# Altium PCB Main Display Module.PcbDoc
Units mil, origin at the board's own origin, x right, y up, seen from the top; angles counter-clockwise.
Board outline 3865 x 3535 mil, 2 copper layers (Top Layer, Bottom Layer); 76 components, 69 nets, 252 pads, 68 vias.
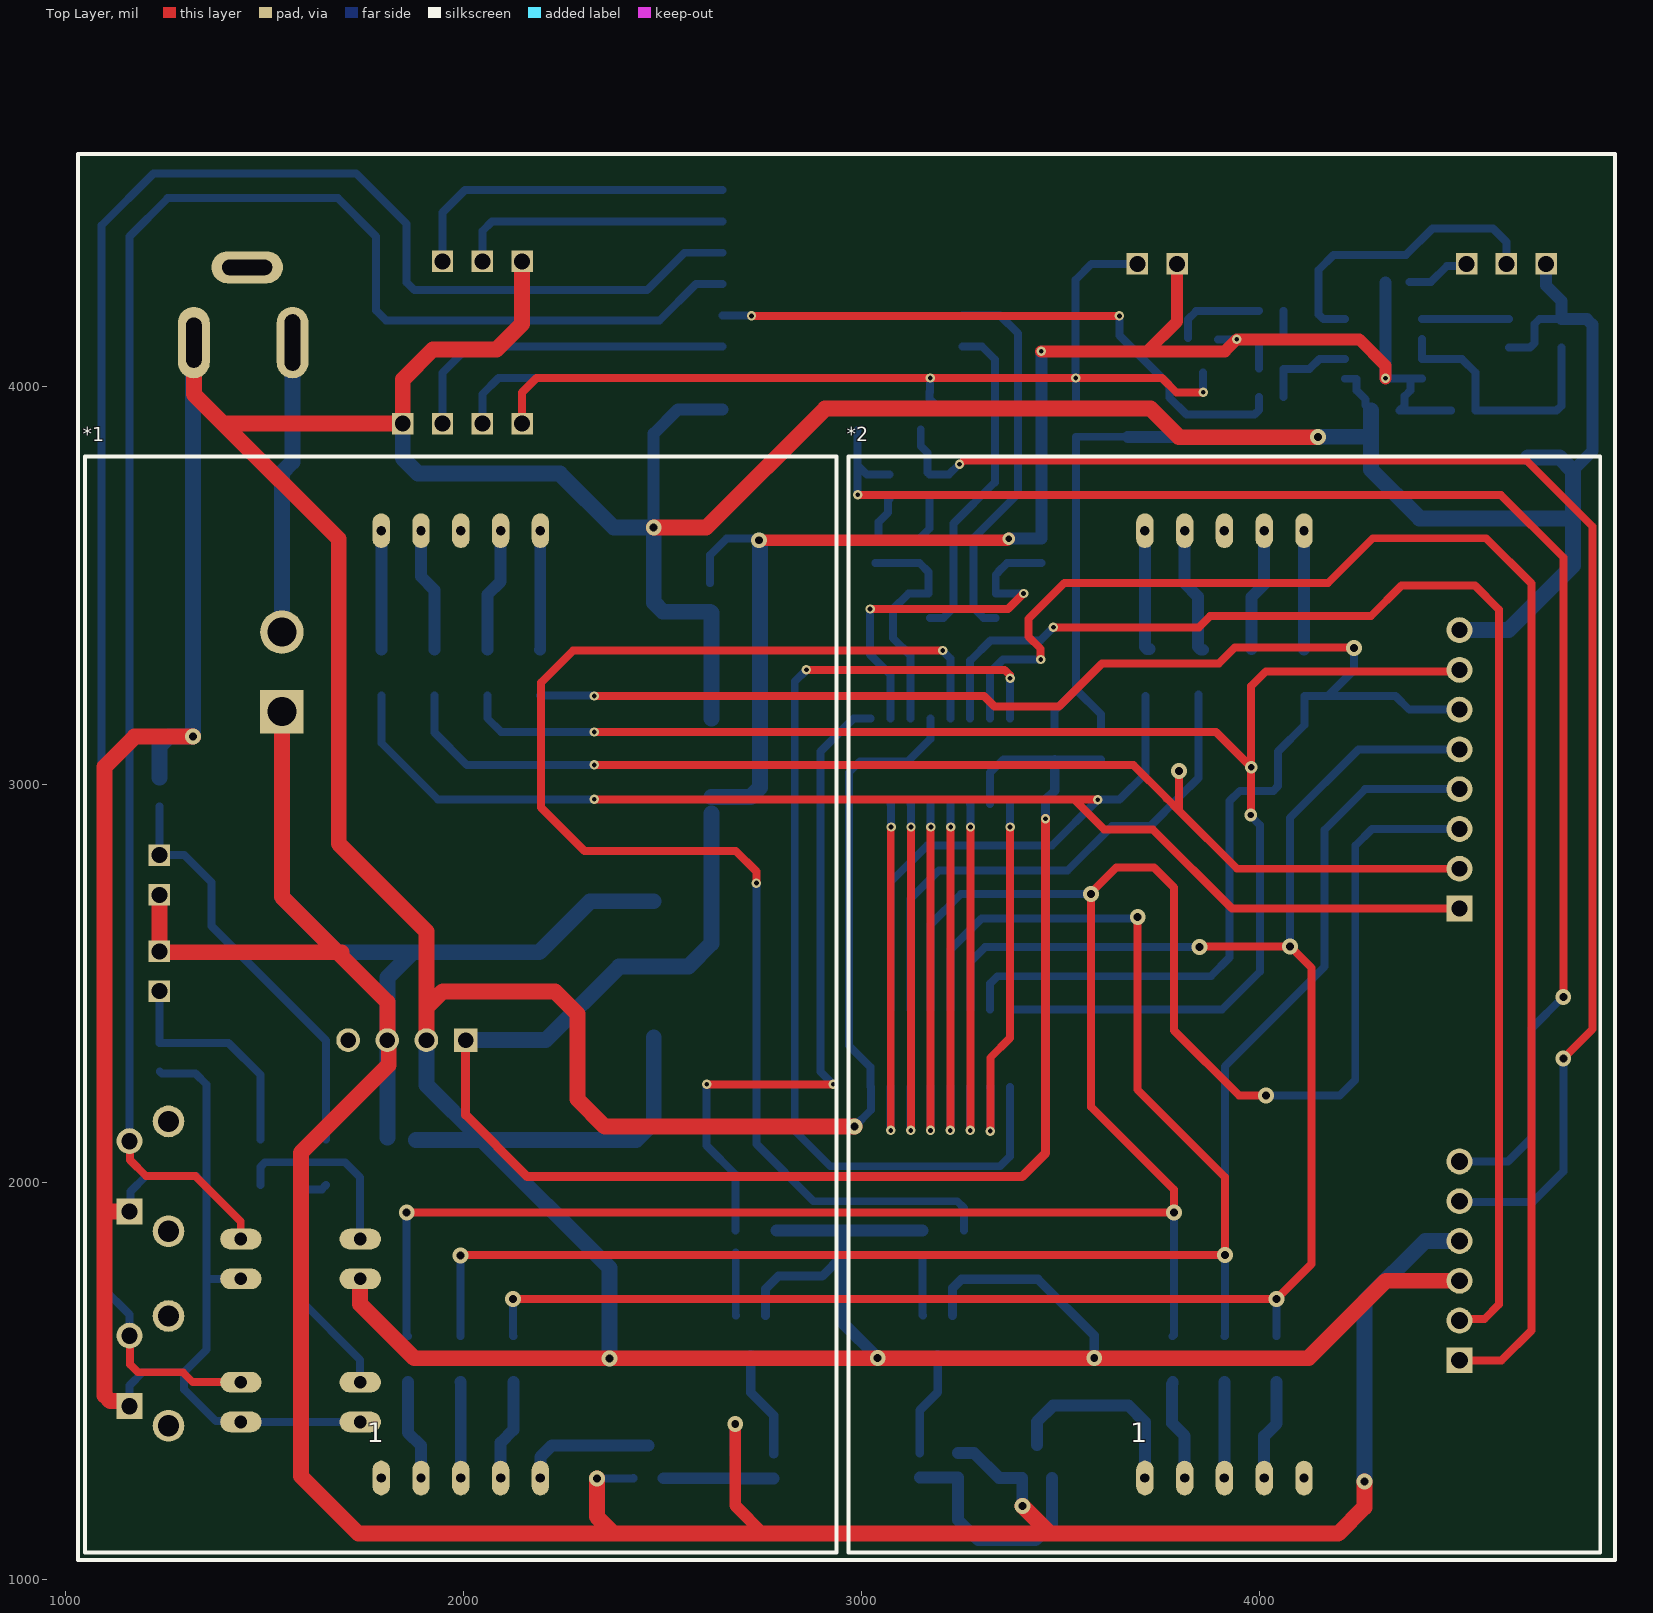
[diagram p0: Top Layer view]
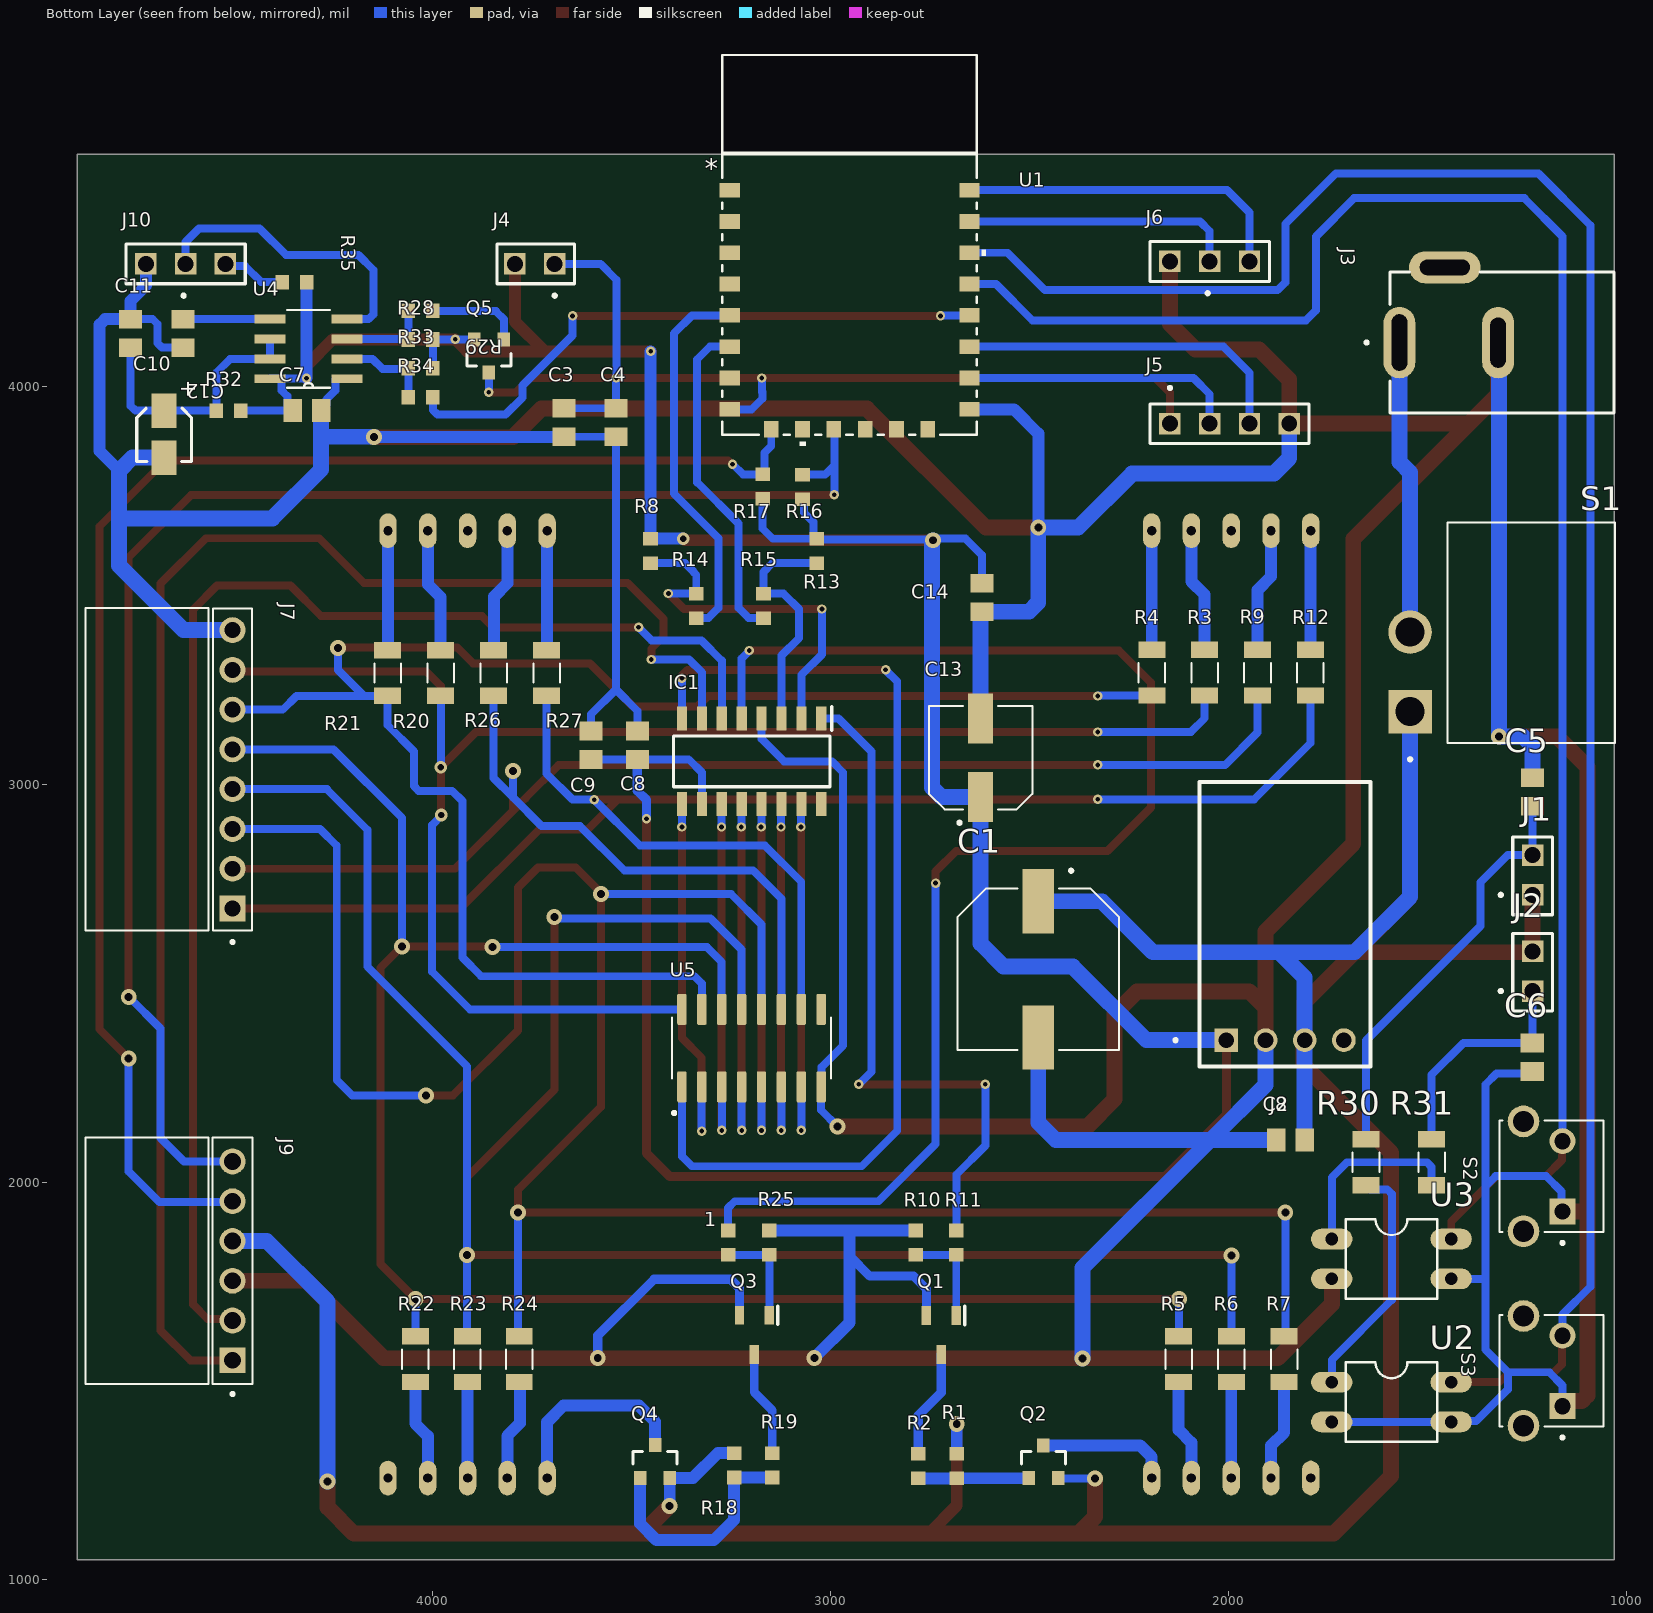
[diagram p1: Bottom Layer view, seen from below]
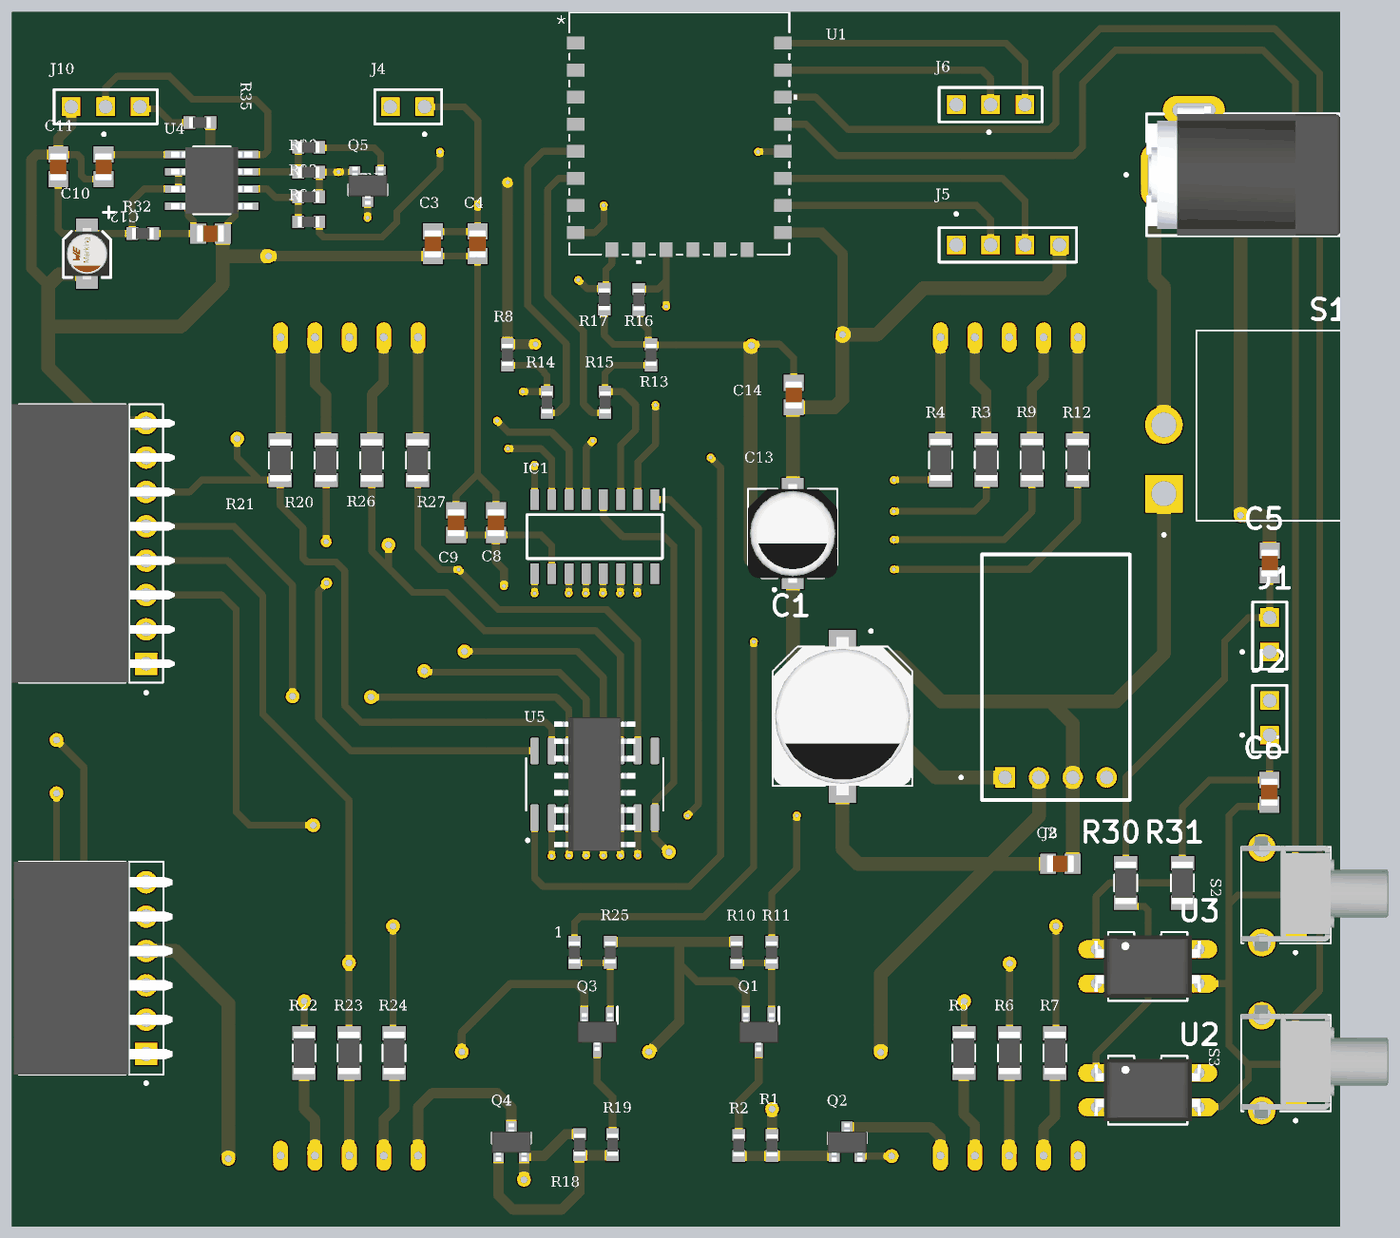
[diagram p2: 3D render of the assembled board from below, using the file's embedded part models]

## Layer stack, top to bottom
Top Solder: solder mask 0.4, Solder Resist, Dk 3.5
Top Layer: signal copper 1.4
Dielectric 1: dielectric 12.6, FR-4, Dk 4.8
Bottom Layer: signal copper 1.4
Bottom Solder: solder mask 0.4, Solder Resist, Dk 3.5

## Board outline
1030,1050 1030,4585 4895,4585 4895,1050

## Design rules (kind name [scope] priority, off if disabled: settings)
Clearance [All] p1: gap=10 ignorepadtopadclearanceinfootprint=FALSE except(0: Arc-Hole Track-Hole SMDPad-Hole THPad-Hole Via-Hole Fill-Hole Poly-Hole Region-Hole Text-Hole)
PolygonConnect [All] p1: connectstyle=Relief reliefconductorwidth=10 reliefentries=4 polygonreliefangle="90 Angle" airgapwidth=10
RoomDefinition "Main Display Module" [InComponentClass('Main Display Module')] p1: confinementstyle=ConfineIn formatcopy=TRUE lockcomponents=FALSE outline 878,1035 4895,1035 4895,4844 878,4844
RoutingVias [All] p1: holewidth=11.81 width=23.62 viastyle="Through Hole" minholewidth=11.81 minwidth=23.62 maxholewidth=28 maxwidth=50
SolderMaskExpansion [All] p1: expansion=4 istentingtop=FALSE
Width [All] p1: maxlimit=100 minlimit=20 preferedwidth=40 minimp=50.000000 maximp=50.000000 favimp=50.000000
30 further rules are at their usual default settings.

## Components (designator, comment, footprint, x,y, rotation, side; value= is the part's Value field where it differs from the comment)
1 "22R" RES0603 3258,1847.83 r90 bottom
*1 "7 Seg" 2.3_7-SEG_DIS 1993,2449 r0 top
*2 "7 Seg" 2.3_7-SEG_DIS 3913,2449 r0 top
C1 "220uF 35V" "220uF 35V" 2478,2535 r270 bottom
C2 "100nF" "Capacitor 0805" 1844,2106 r0 bottom
C3 "100nF" "Capacitor 0805" 3670,3910 r90 bottom
C4 "1uF" "Capacitor 0805" 3540,3910 r90 bottom
C5 "100nF" "Capacitor 0805" 1235,2981 r270 bottom
C6 "100nF" "Capacitor 0805" 1236,2314 r270 bottom
C7 "100nF" "Capacitor 0805" 4317,3940 r0 bottom
C8 "100nF" "Capacitor 0805" 3486.22,3098.43 r90 bottom
C9 "1uF" "Capacitor 0805" 3602.36,3098.43 r90 bottom
C10 "10uF_16V" 10uF_16V 4676,3881 r90 bottom
C11 "100nF" "Capacitor 0805" 4760,4134 r270 bottom
C12 "100nF" "Capacitor 0805" 4628,4134.17 r90 bottom
C13 "47uF 16v" "47uf 16v" 2623,3067 r90 bottom
C14 "100nF" "Capacitor 0805" 2620,3470 r270 bottom
IC1 "TM1650" "TM1650 SOIC127P604X185-16N" 3198.77,3058 r270 bottom
J1 "Pin Header Male 2 Pin_1" "2Pin-M-Header_3MX1-254MM - duplicate" 1235.06,2722.35 r180 bottom
J2 "Pin Header Male 2 Pin_1" "2Pin-M-Header_3MX1-254MM - duplicate" 1235.06,2480.47 r180 bottom
J3 "DC_Power_Jack" DC_Power_Jack 1312,4111 r90 bottom
J4 "Pin Header Male 2 Pin_1" "2Pin-M-Header_3MX1-254MM - duplicate" 3694,4309 r90 bottom
J5 "Programming Port" 4Pin-M-Header_3MX1-254MM 2147,3907 r270 bottom
J6 "Pin Header Male 3 Pin" "3Pin-M-Header_3MX1-254MM - duplicate" 1947,4315 r90 bottom
J7 "Pin Header Female 8 Pin" 8Pin-F-Header_8FX1-254MM 4504,3038 r90 bottom
J8 "Buck Conv" "Regulator Buck-Conv" 1857.36,2896.33 r0 bottom
J9 "Pin Header Female 6 Pin" 6Pin-F-Header_6FX1-254MM 4504,1802 r90 bottom
J10 "Pin Header Male 3 Pin" "3Pin-M-Header_3MX1-254MM - duplicate" 4522,4309 r90 bottom
Q1 "AO3400-N" AO-3400-N-SOT95 2721.87,1615.5 r270 bottom
Q2 "AO3401-P" AO-3401-P-SOT23-3 2465,1295 r180 bottom
Q3 "AO3400-N" AO-3400-N-SOT95 3192,1616 r270 bottom
Q4 "AO3401-P" AO-3401-P-SOT23-3 3441.6,1295.37 r180 bottom
Q5 "AO3401-P" AO-3401-P-SOT23-3 3859.31,4079.31 r0 bottom
R1 "100k" RES0603 2683.19,1286 r270 bottom
R2 "100R" RES0603 2779.8,1286 r90 bottom
R3 "150R" "Resistor 1206" 2059.71,3281.1 r90 bottom
R4 "150R" "Resistor 1206" 2192.6,3281.1 r90 bottom
R5 "150R" "Resistor 1206" 2125,1555 r270 bottom
R6 "150R" "Resistor 1206" 1992.5,1555 r270 bottom
R7 "150R" "Resistor 1206" 1860,1555 r270 bottom
R8 "4.7k" RES0603 3453,3587 r270 bottom
R9 "150R" "Resistor 1206" 1926.82,3281.1 r90 bottom
R10 "100k" RES0603 2786.43,1847.83 r270 bottom
R11 "4.7k" RES0603 2684.19,1847.83 r90 bottom
R12 "150R" "Resistor 1206" 1793.94,3281.1 r90 bottom
R13 "4.7k" RES0603 3035,3587 r270 bottom
R14 "22R" RES0603 3338,3449 r270 bottom
R15 "22R" RES0603 3169,3449 r270 bottom
R16 "10k" RES0603 3070.87,3748.03 r90 bottom
R17 "10k" RES0603 3171,3749 r90 bottom
R18 "100k" RES0603 3243,1288 r270 bottom
R19 "100R" RES0603 3147,1288 r90 bottom
R20 "150R" "Resistor 1206" 3980.76,3280.07 r90 bottom
R21 "150R" "Resistor 1206" 4114,3280.07 r90 bottom
R22 "150R" "Resistor 1206" 4044.43,1555 r270 bottom
R23 "150R" "Resistor 1206" 3913.72,1555 r270 bottom
R24 "150R" "Resistor 1206" 3783,1555 r270 bottom
R25 "100k" RES0603 3154,1847.83 r270 bottom
R26 "150R" "Resistor 1206" 3847.52,3280.07 r90 bottom
R27 "150R" "Resistor 1206" 3714.28,3280.07 r90 bottom
R28 "100k" RES0603 4031,4118.67 r180 bottom
R29 "100R" RES0603 4031,4191 r0 bottom
R30 "1k" "Resistor 1206" 1654,2050 r270 bottom
R31 "1k" "Resistor 1206" 1489,2050 r270 bottom
R32 "470k" RES0603 4514,3940 r180 bottom
R33 "10k" RES0603 4031,4046.33 r180 bottom
R34 "100R" RES0603 4031,3974 r0 bottom
R35 "10k" RES0603 4348,4263 r0 bottom
S1 "DC_SW" DC_SW 1543,3513 r270 bottom
S2 "Switch FSMRA6JH" SWITCH_FSMRA6JH 1160,2014.58 r90 bottom
S3 "Switch FSMRA6JH" SWITCH_FSMRA6JH 1160,1525.42 r90 bottom
U1 "PB-03F" PB-03F 2952.63,4356.5 r180 bottom
U2 "PC817X3NSZ9F" "PC 817" 1590,1447 r270 bottom
U3 "PC817X3NSZ9F" "PC 817" 1590,1807 r270 bottom
U4 "ICM7555IBAZ" ICM7555 4313,4095 r0 bottom
U5 "ULN2003AD" "ULN 2003 SOIC127P600X175-16N" 3199,2337 r90 bottom

## Footprints (in the part's own frame and the unit in brackets; to place one, negate y for a bottom-side part, rotate by r counter-clockwise, add the part's x,y. Pads: shape width x height; smd on the part's side, far side on the other; paste and mask are expansions set on the pad)
2.3_7-SEG_DIS [mm]
  oval 1.108x2.216 hole 0.6: 1(-5.08,-30.3) 2(-2.54,-30.302) 3(0,-30.302) 4(2.54,-30.302) 5(5.08,-30.302) 6(5.08,30.201) 7(2.54,30.201) 8(0,30.201) 9(-2.54,30.201) 10(-5.08,30.201)
  silkscreen extent -24,-35.05 24,34.95
"2Pin-M-Header_3MX1-254MM - duplicate" [mm]
  rect 1.37x1.37 hole 1.02: 01(0,0) 02(0,2.54)
  silkscreen extent -2.13,-1.27 1.27,3.68
"3Pin-M-Header_3MX1-254MM - duplicate" [mm]
  rect 1.37x1.37 hole 1.02: 01(0,0) 02(0,2.54) 03(0,5.08)
  silkscreen extent -2.13,-1.27 1.27,6.35
4Pin-M-Header_3MX1-254MM [mm]
  rect 1.37x1.37 hole 1.02: 1(0,0) 2(0,2.54) 3(0,5.08) 4(0,7.62)
  silkscreen extent -2.39,-1.27 1.27,8.89
6Pin-F-Header_6FX1-254MM [mil]
  rect 65x65 hole 42.13: 1(-250,0)
  round 65 hole 42.13: 2(-150,0) 3(-50,0) 4(50,0) 5(150,0) 6(250,0)
  silkscreen extent -339,-50 310,370, body extent -310,-76 310,385, height 101
8Pin-F-Header_8FX1-254MM [mil]
  rect 65x65 hole 40.16: 1(-350,0)
  round 65 hole 40.16: 2(-250,0) 3(-150,0) 4(-50,0) 5(50,0) 6(150,0) 7(250,0) 8(350,0)
  silkscreen extent -438,-49 405,370, body extent -405,-84 405,391, height 99
10uF_16V [mm]
  rect 2.2x1.6 smd: 1(1.5,0) 2(-1.5,0)
  silkscreen extent -1.75,-1.75 1.65,1.75, body extent -1.9,-1.65 1.9,1.65, height 5.35
"47uf 16v" [mm]
  rect 3.2x1.6 smd: 1(-2.5,0) 2(2.5,0)
  silkscreen extent -4.25,-3.3 3.3,3.3, body extent -3.65,-3.3 3.65,3.3, height 5.8
"220uF 35V" [mm]
  rect 4.1x2 smd: 1(-4.35,0) 2(4.35,0)
  silkscreen extent -6.4,-5.15 5.15,5.15, body extent -5.85,-5.15 5.85,5.15, height 10.32
AO-3400-N-SOT95 [mm]
  rect 1.2x0.6 smd: 1(-1.25,0.95) 2(-1.25,-0.95) 3(1.25,0)
  silkscreen extent -1.85,1.5 -0.65,1.5, body extent -1.4,-1.45 1.4,1.45, height 1.25
AO-3401-P-SOT23-3 [mm]
  rect 0.8x0.9 smd: 1(-0.95,-1) 2(0.95,-1) 3(0,1.1)
  silkscreen extent -1.4,-0.1 1.4,0.7, body extent -1.45,-1.4 1.45,1.4, height 1.25
"Capacitor 0805" [mm]
  rect 1.19x1.47 smd: 1(-0.91,0) 2(0.91,0)
  body extent -1,-0.63 1,0.63, height 1.45
DC_Power_Jack [mm]
  oval 4.572x2.032 hole 1 slot 3.6 at 0 deg: 1(0,6.55)
  oval 4.572x2.032 hole 1 slot 3.2 at 0 deg: 2(0,0.25)
  oval 2.032x4.572 hole 1 slot 3.2 at 90 deg: 3(4.8,3.65)
  silkscreen extent -4.5,-7.15 4.5,8.75, body extent -4.5,-7.15 5.05,7.15, height 11
DC_SW [mm]
  rect 2.775x2.775 / inner round 2.775 / far side rect 2.775x2.775 hole 1.85: 1(8.382,0)
  round 2.775 hole 1.85: 1A(3.302,0)
  silkscreen extent -3.68,-0.1 11.53,13.08
ICM7555 [mil]
  rect 78x22 smd: 1(-97,75) 2(-97,25) 3(-97,-25) 4(-97,-75) 5(97,-75) 6(97,-25) 7(97,25) 8(97,75)
  silkscreen extent -54,-98 54,98, body extent -118,-96 118,96, height 69
PB-03F [mil]
  rect 51x37 smd paste+0 mask+0: 1(-301.5,137.8) 2(-301.5,59.06) 3(-301.5,-19.69) 4(-301.5,-98.43) 5(-301.5,-177.17) 6(-301.5,-255.91) 7(-301.5,-334.65) 8(-301.5,-413.39) 15(301.5,-413.39) 16(301.5,-334.65) 17(301.5,-255.91) 18(301.5,-177.17) 19(301.5,-98.43) 20(301.5,-19.69) 21(301.5,59.06) 22(301.5,137.8)
  rect 37x42 smd paste+0 mask+0: 9(-196.85,-463.5) 10(-118.11,-463.5) 11(-39.37,-463.5) 12(39.37,-463.5) 13(118.11,-463.5) 14(196.85,-463.5)
  silkscreen extent -320,-504 342,478
"PC 817" [mil]
  oval 52x104 hole 32: 1(-50,-150) 2(50,-150) 3(50,150) 4(-50,150)
  silkscreen extent -100,-115 100,115, body extent -91,-155 91,155, height 319
"Regulator Buck-Conv" [mm]
  rect 1.508x1.508 / inner round 1.508 / far side rect 1.508x1.508 hole 1: 1(3.75,13.699)
  round 1.508 hole 1: 2(1.25,13.699) 3(-1.25,13.699) 4(-3.75,13.699)
  silkscreen extent -5.46,-2.79 7.1,15.37, body extent -5.46,-2.86 5.46,15.3, height 0.25
RES0603 [mm]
  rect 0.87x0.93 smd: 1(-0.78,0) 2(0.78,0)
  body extent -0.8,-0.4 0.8,0.4, height 0.55
"Resistor 1206" [mm]
  rect 1.05x1.72 smd: 1(-1.46,0) 2(1.46,0)
  silkscreen extent -0.62,-0.85 0.62,0.85, body extent -1.55,-0.77 1.55,0.77, height 0.65
SWITCH_FSMRA6JH [mm]
  rect 1.651x1.651 hole 1.041: 1(-2.25,0)
  round 1.651 hole 1.041: 2(2.25,0)
  round 2.026 hole 1.351: S1(-3.505,2.49) S2(3.505,2.49)
  silkscreen extent -4.35,-2.61 3.55,4.01, body extent -4.09,-6.83 4.32,4.03, height 10.62
"TM1650 SOIC127P604X185-16N" [mm]
  rect 1.53x0.65 smd: 1(-2.735,4.445) 2(-2.735,3.175) 3(-2.735,1.905) 4(-2.735,0.635) 5(-2.735,-0.635) 6(-2.735,-1.905) 7(-2.735,-3.175) 8(-2.735,-4.445) 9(2.735,-4.445) 10(2.735,-3.175) 11(2.735,-1.905) 12(2.735,-0.635) 13(2.735,0.635) 14(2.735,1.905) 15(2.735,3.175) 16(2.735,4.445)
  silkscreen extent -3.5,-5 1.62,5.12
"ULN 2003 SOIC127P600X175-16N" [mm]
  rrect25% 1.97x0.6 smd: 1(-2.475,4.445) 2(-2.475,3.175) 3(-2.475,1.905) 4(-2.475,0.635) 5(-2.475,-0.635) 6(-2.475,-1.905) 7(-2.475,-3.175) 8(-2.475,-4.445) 9(2.475,-4.445) 10(2.475,-3.175) 11(2.475,-1.905) 12(2.475,-0.635) 13(2.475,0.635) 14(2.475,1.905) 15(2.475,3.175) 16(2.475,4.445)
  silkscreen extent -4.24,-5.06 1.95,5.06, body extent -3,-4.95 3,4.95, height 1.75

## Part data
1 R1 R2 R8 R10 R11 R13 R14 R15 R16 R17 R18 R19 R25 R28 R29 R32 R33 R34 R35: library part "Resistor 0603", "Fixed Resistor CRGCQ 1206 10K 5%", Package="3115 TE Connectivity", Check_prices=https://www.snapeda.com/parts/CRGCQ1206J10K/TE+Connectivity/view-part/?ref=eda, MF="TE Connectivity", MP=CRGCQ1206J10K, SnapEDA_Link=https://www.snapeda.com/parts/CRGCQ1206J10K/TE+Connectivity/view-part/?ref=snap
C1: "220ÂµF 35V Aluminum Electrolytic Capacitors Radial, Can - SMD 2000 Hrs @ 85Â°C", Package="RADIAL-2 Panasonic", Availability="In Stock", Check_prices=https://www.snapeda.com/parts/EEE1VA221P/Panasonic/view-part/?ref=eda, MF=Panasonic, MP=EEE1VA221P, Price=None, SnapEDA_Link=https://www.snapeda.com/parts/EEE1VA221P/Panasonic/view-part/?ref=snap
C2 C3 C4 C5 C6 C7 C8 C9 C11 C12 C14: library part "Capacitor 0805", "0.1 ÂµF Â±10% 50V Ceramic Capacitor X7R 0805 (2012 Metric)", Package="2012 Murata", Check_prices=https://www.snapeda.com/parts/GCE21BR71H104KA01L/Murata+Electronics+North+America/view-part/?ref=eda, MF=Murata, MP=GCE21BR71H104KA01L, SnapEDA_Link=https://www.snapeda.com/parts/GCE21BR71H104KA01L/Murata+Electronics+North+America/view-part/?ref=snap
C10: "CAP, 10UF, 16V, ALU ELEC, SMD; AE Capacitor Case:Radial Can - SMD; Capacitance:10ÂµF; Voltage Rating:16V; ESR:-; Product Range:WCAP-ASLU Series; Lifetime @ Temperature:2000 hours @ 85Â°C; Operating Temperature Min:-40Â°C; Operating Temperature Max:85Â°C;", Package=None, Check_prices=https://www.snapeda.com/parts/865090368008/W%25C3%25BCrth+Elektronik+Midcom/view-part/?ref=eda, MF="WÃ¼rth Elektronik", MP=865090368008, SnapEDA_Link=https://www.snapeda.com/parts/865090368008/W%25C3%25BCrth+Elektronik+Midcom/view-part/?ref=snap
C13: "47ÂµF 16V Aluminum Electrolytic Capacitors Radial, Can - SMD 1000 Hrs @ 105Â°C", Package="RADIAL-2 Panasonic", Availability="In Stock", Check_prices=https://www.snapeda.com/parts/EEE-HA1C470P/Panasonic/view-part/2303036/?ref=eda, MF=Panasonic, MP=EEE-HA1C470P, Price=None, Purchase-URL=https://pricing.snapeda.com/search/part/EEE-HA1C470P/?ref=eda, SnapEDA_Link=https://www.snapeda.com/parts/EEE-HA1C470P/Panasonic/view-part/2303036/?ref=snap
IC1: "<b>The TM1650 is a dedicated LED (LED display) drive control circuit with a keyboard scan interface. The MCU input and output control digital interface, data latch, LED driver, keyboard scan, brightness adjustment and other circuits are integrated inside. The TM1650's stable performance, reliable quality, and high immunity to interference make it suitable for long-term continuous operation in 24 hours</b><p> Source: <a href=\"http://www.titanmec.com/index.php/en/product/download/id/540.html\"> Datasheet </a>", Package=None, Availability="Not in stock", Check_prices=https://www.snapeda.com/parts/TM1650/TMMH/view-part/?ref=eda, MF=tm, MP=TM1650, Price=None, SnapEDA_Link=https://www.snapeda.com/parts/TM1650/TMMH/view-part/?ref=snap
J1 J2 J4 J6 J10: Package=None, Availability=Unavailable, MP=TSW-101-23-L-T, Price=None
J3: "Power Barrel Connector Jack 2.05mm ID (0.081), 5.50mm OD (0.217) Through Hole, Right Angle", Package=None, Check_prices=https://www.snapeda.com/parts/DCJ200-10-A-K1-K/Global+Connector+Technology/view-part/?ref=eda, MF="Global Connector Technology", MP=DCJ200-10-A-K1-K, SnapEDA_Link=https://www.snapeda.com/parts/DCJ200-10-A-K1-K/Global+Connector+Technology/view-part/?ref=snap
J5 J8: "Connector Header Through Hole 4 position 0.098 (2.50mm)", Package=None, Check_prices=https://www.snapeda.com/parts/B4B-XH-A(LF)(SN)/JST+Sales+America+Inc./view-part/?ref=eda, MF="JST Sales", MP=B4B-XH-A(LF)(SN), SnapEDA_Link=https://www.snapeda.com/parts/B4B-XH-A(LF)(SN)/JST+Sales+America+Inc./view-part/?ref=snap
J7: "Headers & Wire Housings 2.54MM 0.1 8-PIN FEMALE HEADER", Package=None, Availability="In Stock", Check_prices=https://www.snapeda.com/parts/8Fx1-254mm/Gravitech/view-part/?ref=eda, MF=Gravitech, MP=8Fx1-254mm, Price=None, Purchase-URL=https://pricing.snapeda.com/search/part/8Fx1-254mm/?ref=eda, SnapEDA_Link=https://www.snapeda.com/parts/8Fx1-254mm/Gravitech/view-part/?ref=snap
J9: "6 Position Total Single Row 2.54 mm Pitch Straight Female Header", Package=None, Check_prices=https://www.snapeda.com/parts/PPTC061LFBNRC/Sullins/view-part/?ref=eda, MF="Sullins Connector Solutions", MP=PPTC061LFBNRC, SnapEDA_Link=https://www.snapeda.com/parts/PPTC061LFBNRC/Sullins/view-part/?ref=snap
Q1 Q3: "N-Channel 30 V 5.8A (Ta) 1.4W (Ta) Surface Mount SOT-23-3", Package="SOT-23-3 Alpha &amp; Omega Semiconductor", Check_prices=https://www.snapeda.com/parts/AO3400/Alpha+%2526+Omega+Semiconductor+Inc./view-part/?ref=eda, MF="Alpha &", MP=AO3400, SnapEDA_Link=https://www.snapeda.com/parts/AO3400/Alpha+%2526+Omega+Semiconductor+Inc./view-part/?ref=snap
Q2 Q4 Q5: "P-Channel 30 V 4A (Ta) 1.4W (Ta) Surface Mount SOT-23-3", Package="SOT-23-3 Alpha &amp; Omega Semiconductor", Check_prices=https://www.snapeda.com/parts/AO3401/Alpha/view-part/?ref=eda, MF="Alpha & Omega Semiconductor", MP=AO3401, SnapEDA_Link=https://www.snapeda.com/parts/AO3401/Alpha/view-part/?ref=snap
R3 R4 R5 R6 R7 R9 R12 R20 R21 R22 R23 R24 R26 R27 R30 R31: library part "Resistor 1206", "Fixed Resistor CRGCQ 1206 10K 5%", Package="3115 TE Connectivity", Check_prices=https://www.snapeda.com/parts/CRGCQ1206J10K/TE+Connectivity/view-part/?ref=eda, MF="TE Connectivity", MP=CRGCQ1206J10K, SnapEDA_Link=https://www.snapeda.com/parts/CRGCQ1206J10K/TE+Connectivity/view-part/?ref=snap
S1: "Rocker Switch,R1966 Series,SPST,ON-OFF,Concave,Black,I/O, 15A, 125VAC,R/A P", Package=None, Check_prices=https://www.snapeda.com/parts/R1966ABLKBLKFR/E-Switch/view-part/?ref=eda, MF=E-Switch, MP=R1966ABLKBLKFR, SnapEDA_Link=https://www.snapeda.com/parts/R1966ABLKBLKFR/E-Switch/view-part/?ref=snap
S2 S3: "Tactile Switch SPST-NO Side Actuated Through Hole, Right Angle", Package=None, Check_prices=https://www.snapeda.com/parts/FSMRA6JH/TE+Connectivity+ALCOSWITCH+Switches/view-part/?ref=eda, MF="TE Connectivity", MP=FSMRA6JH, SnapEDA_Link=https://www.snapeda.com/parts/FSMRA6JH/TE+Connectivity+ALCOSWITCH+Switches/view-part/?ref=snap
U1: "Description", Manufacturer_Name=Ai-Thinker, Copyright="Copyright (C) 2025 Ultra Librarian. All rights reserved.", Manufacturer_Part_Number=PB-03F, RefDes=RefDes, Type=RF
U2 U3: "Optoisolator Transistor Output 5000Vrms 1 Channel 4-DIP", Package="DIP-4 Sharp Microelectronics", Check_prices=https://www.snapeda.com/parts/PC817X3NSZ9F/Sharp+Microelectronics/view-part/?ref=eda, MF="Sharp Microelectronics", MP=PC817X3NSZ9F, SnapEDA_Link=https://www.snapeda.com/parts/PC817X3NSZ9F/Sharp+Microelectronics/view-part/?ref=snap
U4: "555 Type, Timer/Oscillator (Single) IC 1MHz 8-SOIC", Package="SOIC-8 Renesas Electronics America Inc", Check_prices=https://www.snapeda.com/parts/ICM7555IBAZ/Renesas/view-part/?ref=eda, MF="Renesas Electronics America Inc", MP=ICM7555IBAZ, SnapEDA_Link=https://www.snapeda.com/parts/ICM7555IBAZ/Renesas/view-part/?ref=snap
U5: "50-V, 7-ch darlington transistor array, -20C to 70C", Package="SOIC-16 Texas Instruments", Check_prices=https://www.snapeda.com/parts/ULN2003AD/Texas+Instruments/view-part/?ref=eda, MF="Texas Instruments", MP=ULN2003AD, SnapEDA_Link=https://www.snapeda.com/parts/ULN2003AD/Texas+Instruments/view-part/?ref=snap

## Via types
v1: diameter 23.62, hole 11.81, Top Layer to Bottom Layer, 38 vias
v2: diameter 40, hole 20, Top Layer to Bottom Layer, 27 vias
v3: diameter 32, hole 16, Top Layer to Bottom Layer, 3 vias

## Nets (pads, with @x,y where several pads share a name; then routed paths per layer and width w, separated by ;. In a path a pad name is that pad's centre, name@x,y a point inside that pad or via, vN(x,y) a via of type N, cw(c..) or ccw(c..) an arc to the next point about the centre after c; other vN are vias at no path point)
+3: C7.2 C8.1 C9.1 C13.1 C14.1 IC1.10 J4.02 J8.1 Q5.2 R8.1 R13.1 R16.1 R17.1 R28.2 R32.2 R33.2 R35.1 U4.8 | length 8842.2
  Top Layer w23: J8.1 2005,2169 2160,2014 3404,2014 3463,2073 v1(3463,2914)
  Top Layer w30: v2(2743,3614) 3366.46,3614 3370.46,3618 v3(3371,3618) ; v1(3452.26,4089.08) 3719.08,4089.08 ; J4.02 3794,4164 3719.08,4089.08 ; v1(4318,4021) 4318,4053 4252,4119 v1(3944,4119) 3914.08,4089.08 3719.08,4089.08
  Bottom Layer w20: C14.1 2620,3576.69 2661.42,3618.11 2693.48,3618.11 2693.76,3617.83 2739.17,3617.83 v2(2743,3614) 2744.85,3615.85 3033.15,3615.85 R13.1 3145.71,3617.71 3171,3643 R17.1 ; R13.1@3043.31,3624.83 3043.31,3659.45 3067.09,3683.24 3067.09,3713.55 R16.1 ; IC1.10 3323.77,3029.77 3357.17,3063.17 3485.65,3063.17 C8.1 C9.1 ; R8.1 R8.1@3453,3618.69 ; Q5.2@3897.03,4119 v1(3944,4119) 3944.17,4118.83 3999.12,4118.83 R28.2@4000.29,4120 ; R33.2 R28.2 ; R35.1@4317,4263 R35.1@4317.5,4262.5 ; v1@4317.5,4021.5 v1(4318,4021) 4318.5,4020.5 4409.5,4020.5 U4.8 ; U4.8@4381,4019 4381,3991 4366.25,3976.25 4366.25,3953.43 C7.2 R32.2
  Bottom Layer w23: v1(3463,2914) 3463,2961 3486.22,2984.22 C8.1
  Bottom Layer w30: v3(3371,3618) 3371.15,3617.85 3452.16,3617.85 3453,3618.69 v1@3453,4089 ; v1@4317.5,4021.5 R35.1@4317.5,4262.5
  Bottom Layer w40: J8.1 2206,2357 2391,2542 2565,2542 2623,2600 C13.1@2623,2927.24 ; C13.1 2721.57,2968.57 2745,2992.01 2745,3612 v2(2743,3614)
+3WDT: C3.2 C4.2 J4.01 J5.1 Q5.3 U1.8 | length 2642.8
  Top Layer w20: J5.1 2147,3985.4 2183.6,4022 v1(3173,4022) 3756,4022 3792,3986 v1(3860,3986)
  Bottom Layer w20: v1(3173,4022) 3172.31,4021.31 3172.31,3986.61 3172,3986.3 3172,3969.73 3198.62,3943.11 U1.8 ; C3.2 C4.2 3539.5,3946.33 3539.5,4021.5 v1(3539,4022) 3539,4269 3579,4309 J4.01 ; Q5.3 3859.66,4035.67 3859.66,3986.34 v1(3860,3986)
+12: C1.1 C2.1 J1.01 J2.02 J8.3 J9.4 Q2.2 Q4.2 R1.1 R18.1 S1.1 | length 9288.3
  Top Layer w30: v2(2683,1392) 2683,1187 2753.86,1116.14
  Top Layer w40: J1.01 1235.06,2582.94 1240,2578 1693,2578 ; S1.1 1543,2718 1808.15,2452.85 J8.3 ; J8.3@1811.86,2352.86 1811.86,2294.86 1591,2074 1591,1261 1735.86,1116.14 2377.72,1116.14 ; v2(2335,1255) 2335,1158.86 2377.72,1116.14 ; v2(3405,1186) 3474.86,1116.14 ; v2(4265,1247) 4265,1182.32 4198.82,1116.14 3474.86,1116.14 ; 2377.72,1116.14 2753.86,1116.14 3474.86,1116.14
  Bottom Layer w20: v2(2335,1255) 2335.32,1255.32 2427.28,1255.32 Q2.2 ; v2(2683,1392) v2@2683.09,1391.91 ; R1.1@2683.09,1316.8 R1.1 ; Q4.2 Q4.2@3404.6,1255.6 ; v2@3404.6,1186.4 v2(3405,1186)
  Bottom Layer w30: R1.1@2683.09,1316.8 v2@2683.09,1391.91 ; R18.1 3283.81,1318.71 3346.52,1256 Q4.2 ; v2@3404.6,1186.4 Q4.2@3404.6,1255.6
  Bottom Layer w40: S1.1 1543,2718 1683,2578 1872,2578 ; C2.1@1808.15,2112.54 1808.15,2514.15 1872,2578 ; C1.1 2318.26,2706.26 2190,2578 1872,2578 ; v2(4265,1247) 4265,1699 4418,1852 J9.4
+12SW: J3.1 S1.1A | length 739.1
  Bottom Layer w40: S1.1A 1543,3784 1569.87,3810.87 J3.1
A: IC1.8 U5.1 | length 2560.6
  Top Layer w20: v1(2862,3288) 3360.47,3288 3373.31,3275.17 3373.31,3267.69 v1(3374,3267)
  Bottom Layer w20: v1(2862,3288) 2832.68,3258.68 2832.68,2129.32 2922,2040 3349,2040 3374,2065 U5.1 ; IC1.8 3373.89,3165.79 3373.89,3266.89 v1(3374,3267)
B: IC1.9 U5.2 | length 954
  Top Layer w20: v1(3324.4,2128.35) 3324.4,2312.59 3374,2362.19 v1(3374,2893)
  Bottom Layer w20: U5.2 3324.4,2239.16 v1(3324.4,2128.35) ; IC1.9 3373.89,2950.21 3373.89,2893.11 v1(3374,2893)
Button_1: S3.2 U1.20 U2.4 | length 5052.4
  Top Layer w20: S3.2 1161.02,1612.98 1161.02,1541.98 1181,1522 1294,1522 1319,1497 U2.4
  Bottom Layer w20: S3.2 1160,1667 1090,1737 1090,4406 1220,4536 1730,4536 1857,4409 1857,4262 1876,4243 2461.5,4243 2555.32,4336.81 U1.20
Button_1_EXT: C5.2 J1.02 R30.1 | length 1047.9
  Bottom Layer w20: J1.02 1297.65,2822.35 1366,2754 1366,2644 1654,2356 R30.1 ; J1.02@1235.03,2822.38 C5.2@1235.03,2945.14
Button_2: S2.2 U1.19 U3.4 | length 4514.4
  Top Layer w20: S2.2 1161.11,2102.05 1161.11,2055.89 1202,2015 1326,2015 1439.72,1901.28 1439.72,1857.28 U3.4
  Bottom Layer w20: S2.2 1160,4378 1256,4474 1684,4474 1780,4378 1780,4192 1805,4167 2493,4167 2584.07,4258.07 U1.19
Button_2_EXT: C6.1 J2.01 R31.1 | length 582.2
  Bottom Layer w20: J2.01@1235,2483 1235.5,2482.5 1235.5,2350.33 C6.1 1409.17,2349.83 1489,2270 R31.1
C: IC1.11 U5.3 | length 930.4
  Top Layer w20: v1@3273.62,2129.92 3274.12,2130.42 3274.12,2892.5 v1(3274.62,2893)
  Bottom Layer w20: v1@3273.62,2129.92 U5.3@3273.62,2239.18 ; IC1.11 3274.2,2949.9 3274.2,2893.43 v1(3274.62,2893)
  other v1: 3273.62,2130
D: IC1.12 U5.4 | length 932.2
  Top Layer w20: v1@3223.61,2130.76 3224.5,2131.65 3224.5,2892.5 v1(3225,2893)
  Bottom Layer w20: IC1.12 3224.39,2949.71 3224.39,2893.61 v1(3225,2893) ; v1@3224,2128 U5.4
  other v1: 3224,2130
DIG1: IC1.1 R11.2 | length 1726.1
  Top Layer w20: v1(2611,2246) v1@2929.1,2246.03
  Bottom Layer w20: v1(2611,2246) 2611,2092 2684.19,2018.81 R11.2 ; v1(2929.13,2246.06) 2897.64,2277.56 2897.64,3082.68 2980.64,3165.68 IC1.1
DIG2: 1.2 IC1.5 | length 3474.1
  Top Layer w20: v1(2736.22,2751.97) 2736.22,2780.78 2684.32,2832.68 2304,2832.68 2194.88,2941.8 2194.88,3255.91 2275.59,3336.61 v1(3204.72,3336.61)
  Bottom Layer w20: v1(2736.22,2751.97) 2736.22,2095.78 2880,1952 3241,1952 3258,1935 1.2 ; v1(3204.72,3336.61) 3204.72,3335.63 3223.77,3316.59 IC1.5
DIG3: IC1.6 J9.2 | length 3441.4
  Top Layer w20: v1(3483,3395) 3849,3395 3877,3423 4281,3423 4358,3500 4543,3500 4603,3440 4603,1692 4566.5,1655.5 4507.5,1655.5 J9.2
  Bottom Layer w20: IC1.6 3273.77,3311.17 3324.6,3362 3450,3362 v1(3483,3395)
DIG4: IC1.7 J9.1 | length 3857.9
  Top Layer w20: v1(3451,3314) 3451,3341 3420,3372 3420,3416 3511,3507 4174,3507 4286,3619 4571,3619 4685,3505 4685,1627 4610,1552 J9.1
  Bottom Layer w20: IC1.7 3323.77,3281.77 3356,3314 v1(3451,3314)
E: IC1.13 U5.5 | length 932.7
  Top Layer w20: v1@3174.2,2129.99 3174.5,2130.29 3174.5,2892.5 v1(3175,2893)
  Bottom Layer w20: IC1.13 3174.39,2949.71 3174.39,2893.61 v1(3175,2893) ; v1@3174,2128 U5.5
  other v1: 3174,2130
F: IC1.14 U5.6 | length 931.8
  Top Layer w20: v1(3124,2130) 3124.5,2130.5 3124.5,2892.5 v1(3125,2893)
  Bottom Layer w20: IC1.14 3124.39,2949.71 3124.39,2893.61 v1(3125,2893) ; v1@3124,2129 v1(3124,2130) U5.6
G: IC1.15 U5.7 | length 931.1
  Top Layer w20: v1@3074,2131.67 3074,2891.13 3074.89,2892.02 v1(3074.89,2893)
  Bottom Layer w20: IC1.15 3074.33,2949.77 3074.33,2893.56 v1(3074.89,2893) ; v1@3073.89,2136.75 v1@3073.94,2136.81 ; v1@3073.94,2128.06 3073.94,2239.5 U5.7
  other v1: 3073.89,2130
GND: C1.2 C2.2 C3.1 C4.1 C5.1 C6.2 C7.1 C8.2 C9.2 C10.2 C11.1 C12.1 C13.2 C14.2 IC1.4 J3.2 J5.4 J6.03 J7.8 J8.2 J9.3 J10.03 Q1.2 Q3.2 R10.1 R25.1 S2.1 S3.1 U1.15 U2.2 U2.3 U3.2 U3.3 U4.1 U5.8 | length 24759.2
  Top Layer w30: v2@4147,3873 v2(4148,3874)
  Top Layer w40: S3.1 1147.5,1449.33 1111.6,1449.33 1097.5,1463.43 1097.5,1926 ; S2.1 1097.5,1926 ; v2(1320,3120) 1173,3120 1097.5,3044.5 1097.5,1926 ; J3.2 1321.84,3981.16 1396,3907 ; U3.2 1740,1693 1875.91,1557.09 3040.14,1557.09 v2(3041.25,1558.2) 3042.36,1557.09 4124.02,1557.09 4318.93,1752 J9.3 ; J8.2 1906.57,2438.57 ; J6.03 2147,4158 2083,4094 1923,4094 1847,4018 J5.4 1396,3907 ; v2(2478,3646) 2610,3646 2909,3945 3727.29,3945 3799.29,3873 v2@4147,3873 ; v2(2982.8,2139.77) 2355.23,2139.77 2286,2209 2286,2423 2229.43,2479.57 1947.57,2479.57 1906.57,2438.57 ; 1396,3907 1686,3617 1686,2851 1906.57,2630.43 1906.57,2438.57
  Bottom Layer w20: S3.1 1160,1489 1193,1522 1297,1522 ; S2.1 1162.78,1928.78 1162.78,1976.78 1201,2015 1328,2015 1354,1989 ; C6.2 1241.17,2273 1326,2273 1354,2245 1354,1989 ; U3.3 1358,1757 1354,1761 ; U3.2@1737.72,1754.72 U3.2 ; U2.2 U2.3 1437.9,1399.1 1376.9,1399.1 1297,1479 1297,1522 ; U1.15@2650.19,3944.06 U1.15 ; v2(2982.8,2139.77) 3024,2180.97 U5.8 3022.58,2240.98 3022.58,2289.42 2968.5,2343.5 2968.5,3029.5 2997,3058 3117.06,3058 3173.77,3114.72 IC1.4 ; C8.2 3486.22,3185.04 3540,3238.82 ; C9.2 3602.36,3176.46 3540,3238.82 ; C3.1 C4.1 3540,3238.82 ; U4.1 4244,4020 4245,4019 4245,3991 4267.75,3968.25 4267.75,3953.43 C7.1 ; C12.1 4681.28,4098.35 4693,4110.06 4693,4158.11 4704.72,4169.83 C11.1 ; C10.2 C10.2@4676.06,3822 ; 1297,1522 1354,1579 1354,1761 ; 1354,1761 1354,1989
  Bottom Layer w23: Q1.2 2759.28,1731.72 2791.34,1763.78 2901.57,1763.78 2952.76,1814.96 ; Q3.2 3229.4,1733.4 3252,1756 3444,1756 3585.64,1614.36 v2(3585.64,1558.25)
  Bottom Layer w30: v2(2478,3646) 2478,3882 2539.11,3943.11 U1.15 ; R10.1 2952.76,1878.54 ; v2(3041.25,1558.2) 2952.76,1646.7 2952.76,1814.96 2952.76,1878.54 ; R25.1 2952.76,1878.54 ; C3.1 3670.09,3874.09 4147.91,3874.09 v2(4148,3874) v2@4148.17,3874.17 ; J10.03 4722,4254 4760,4216 C11.1 4824.17,4169.83 4838,4156 4838,3838 4789,3789
  Bottom Layer w40: C5.1 1235,3096 1259,3120 v2(1320,3120) J3.2@1320,4109.16 ; J5.4 1847,3820.32 1885.83,3781.5 2242.13,3781.5 2377.62,3646 v2(2478,3646) 2478,3457.6 2501.43,3434.17 C14.2 2623,3431.17 C13.2 ; C2.2 2045,2106 ; J8.2 1906.57,2244.43 2045,2106 ; v2(2367,1557) 2367,1784 2045,2106 ; C1.2 2478,2150 2434,2106 2045,2106 ; v2@4148.17,3874.17 4281.17,3874.17 ; C7.1 4281.17,3874.17 ; J7.8 4627,3388 4789,3550 4789,3669 4404,3669 4281.17,3791.83 4281.17,3874.17 ; C10.2@4676.06,3822 4756,3822 4789,3789 4789,3672
HeartBeat: R34.1 U1.18 | length 1536.1
  Top Layer w20: v1(2723.87,4178) v1(3649,4178)
  Bottom Layer w20: U1.18 2651.8,4178.67 2723.2,4178.67 v1(2723.87,4178) ; v1(3649,4178) 3649,4129 3775,4003 3775,3972.5 3817.5,3930 3988.58,3930 4000.29,3941.72 R34.1
IN_1: J9.6 R16.2 U1.11 | length 3793.5
  Top Layer w20: v1(2991,3728) 4608,3728 4765,3571 v2(4765,2466)
  Bottom Layer w10: U1.11@2990.16,3891.16 U1.11
  Bottom Layer w20: U1.11@2990.16,3891.16 2990.85,3890.46 2990.85,3802.31 ; v1(2991,3728) 2990.85,3728.15 2990.85,3802.31 ; R16.2 3014.42,3778.74 2990.85,3802.31 ; J9.6 4626,2052 4685,2111 4685,2386 v2(4765,2466)
IN_2: J9.5 R17.2 U1.9 | length 3819.4
  Top Layer w20: v1(3247,3805) 3247.98,3805 3257.98,3815 4672,3815 4839,3648 4839,2385 v2(4765,2311)
  Bottom Layer w20: U1.9 3149.48,3851 3166.5,3833.98 3166.5,3784.21 R17.2 3220.73,3779.71 3246.02,3805 v1(3247,3805) ; J9.5 4506,1950 4688,1950 4765,2027 v2(4765,2311)
Main_A: J7.7 R3.1 R20.1 U5.16 | length 4143.9
  Top Layer w20: v1(2328.74,3131.7) 3891.92,3131.7 v3@3979.66,3043.96 ; v3(3979,2923) 3979.66,2923.66 v3@3979.66,3043.96 ; J7.7 4500,3284 4017,3284 3980.32,3247.32 v3(3980.32,3043.31) v3@3979.66,3043.96
  Bottom Layer w20: R3.1 2059.71,3166.67 2094.49,3131.89 v1@2328.74,3131.89 ; U5.16 3907.44,2434.44 4002,2529 4002,2898.28 3979,2921.28 v3(3979,2923) ; v3(3980.32,3043.31) R20.1@3980.32,3222.14
Main_B: J7.6 R4.1 R21.1 U5.15 | length 4150
  Top Layer w20: v1(2328.74,3222.44) 3308.56,3222.44 3335,3196 3497,3196 3605,3304 3899,3304 3939,3344 v2@4240,3344
  Bottom Layer w20: R4.1 2193.19,3223.03 v1@2328.15,3223.03 ; U5.15 3324,2499.2 3342.52,2517.72 3878.72,2517.72 3926,2565 3926,2958 3952,2984 4036.28,2984 4048,2995.72 4048,3083 4114,3149 R21.1 4173.59,3222.59 ; v2(4239.03,3343.04) 4239.03,3288.03 4173.59,3222.59 ; J7.6 4378,3188 4343.41,3222.59 4173.59,3222.59
Main_C: J7.5 R5.1 R22.1 U5.14 | length 4814.8
  Top Layer w20: v2(2124,1706) v2(4044,1706) 4132,1794 4132,2539 4076,2595 4073,2592 3851,2592 v2(3850,2591)
  Bottom Layer w20: v2(2124,1706) 2124,1613.48 R5.1 ; U5.14 3274,2553.53 3311.47,2591 v2(3850,2591) ; v2(4044,1706) 4044,1612.91 R22.1 ; v2(4078,2593) 4078,2916 4250,3088 J7.5
Main_D: J7.4 R6.1 R23.1 U5.13 | length 5482.1
  Top Layer w20: v2(1992,1816) 1992.5,1816.5 3913.5,1816.5 v2(3914,1817) 3914,2013.17 3694,2233.17 3694,2666 v2(3695,2667)
  Bottom Layer w20: v2(1992,1816) 1992,1612.98 R6.1 ; U5.13 3224,2585 3302,2663 3673.28,2663 3673.46,2663.17 3691.17,2663.17 v2(3695,2667) ; R23.1 3914,1612.76 v2(3914,1817) 3914,2291 4165,2542 4165,2886 4267,2988 J7.4
Main_E: J7.3 R7.1 R24.1 U5.12 | length 6116
  Top Layer w20: v2(1857,1924) v2(3786,1924) 3786,1981 3578,2189 3578,2728 3641,2791 3736,2791 3786.5,2740.5 3786.5,2381.5 3950,2218 v2(4018,2218)
  Bottom Layer w20: v2(1857,1924) 1857,1615.48 R7.1 ; U5.12 3174,2648 3250,2724 v2(3578,2724) ; R24.1 3786,1615.48 v2(3786,1924) ; v2(4018,2218) 4203,2218 4242,2257 4242,2846 4284,2888 J7.3
Main_F: J7.2 R9.1 R26.1 U5.11 | length 4315.8
  Top Layer w20: v1(2328.74,3049.02) 3683.98,3049.02 3767.81,2965.19 3799,2934 ; v2(3799,3034) 3799,2934 ; J7.2 3945,2788 3799,2934
  Bottom Layer w20: R9.1 1926.82,3130.26 2008.07,3049.02 v1(2328.74,3049.02) ; U5.11 3124,2712.58 3195.42,2784 3519,2784 3630.74,2895.74 3727.26,2895.74 3799,2967.48 ; v2(3799,3034) 3799,2967.48 ; R26.1@3847.52,3225.59 3847.52,3016 3799,2967.48
Main_G: J7.1 R12.1 R27.1 U5.10 | length 4331.2
  Top Layer w20: v1(2328.74,2962.6) 3535,2962.6 ; v1@3594.87,2962.6 3535,2962.6 ; J7.1 3932,2688 3733,2887 3610.6,2887 3535,2962.6
  Bottom Layer w20: R12.1 1793.94,3103.7 1935.04,2962.6 v1(2328.74,2962.6) ; U5.10 3074,2755.1 3164.9,2846 3479.06,2846 v1(3594.87,2961.81) 3649.09,2961.81 3714.28,3027 R27.1
Net1_1: 1.1 Q3.1 R25.2 | length 256.2
  Bottom Layer w20: Q3.1 3154.3,1665.51 3154.3,1816.83 R25.2 1.1
Net*1_2: *1.2 R7.2 | length 255.2
  Bottom Layer w30: R7.2 1860,1370.31 1893,1337.31 *1.2
Net*1_3: *1.3 R6.2 | length 241.7
  Bottom Layer w30: R6.2 1992.75,1497.27 1992.75,1256.25 *1.3
Net*1_4: *1.4 R5.2 | length 254.8
  Bottom Layer w30: *1.4 2093,1344.97 2125,1376.97 R5.2
Net*1_5: *1.5 Q2.3 | length 337.4
  Bottom Layer w20: *1.5 *1.5@2193.18,1255.82
  Bottom Layer w30: *1.5 2193,1309 2222.31,1338.31 Q2.3
Net*1_6: *1.6 R4.2 | length 299.6
  Bottom Layer w30: R4.2 2192.8,3338.78 2192.8,3637.8 *1.6
Net*1_7: *1.7 R3.2 | length 313.2
  Bottom Layer w30: R3.2 2059.71,3477.03 2093,3510.32 *1.7
Net*1_9: *1.9 R9.2 | length 313.4
  Bottom Layer w30: *1.9 1893,3522.35 1926.82,3488.53 R9.2
Net*1_10: *1.10 R12.2 | length 299.8
  Bottom Layer w30: *1.10 1793.47,3637.53 1793.47,3339.05 R12.2
Net*2_1: *2.1 Q4.3 | length 504.9
  Bottom Layer w30: Q4.3 3441.6,1397.6 3482,1438 3672,1438 3713,1397 *2.1
Net*2_2: *2.2 R24.2 | length 255.2
  Bottom Layer w30: R24.2 3783,1493.35 3781.5,1491.85 3781.5,1393.7 3813,1362.2 *2.2
Net*2_3: *2.3 R23.2 | length 241.8
  Bottom Layer w30: *2.3 3913.36,1256.36 3913.36,1497.16 R23.2
Net*2_4: *2.4 R22.2 | length 254.5
  Bottom Layer w30: *2.4 4013,1361.43 4044.43,1392.86 R22.2
Net*2_6: *2.6 R21.2 | length 299.8
  Bottom Layer w10: R21.2@4113,3339.58 R21.2@4114,3338.58
  Bottom Layer w30: R21.2@4113,3339.58 *2.6
Net*2_7: *2.7 R20.2 | length 310.8
  Bottom Layer w30: R20.2@3980.76,3340.55 3980.76,3470.92 4013,3503.16 *2.7
Net*2_9: *2.9 R26.2 | length 321.7
  Bottom Layer w30: *2.9 3813,3505.9 3846.46,3472.44 3846.46,3346.22 3854.09,3338.58 R26.2@3859.33,3338.58
Net*2_10: *2.10 R27.2 | length 305.3
  Bottom Layer w30: *2.10 3713,3346.22 3718.67,3340.55 R27.2@3724.13,3340.55
NetC12_2: C12.2 U4.5 | length 218
  Bottom Layer w20: U4.5 C12.2
NetJ10_01: J10.01 R35.2 | length 164.5
  Bottom Layer w20: R35.2 4432,4263 4472,4303 J10.01@4522,4303 ; J10.01@4518.75,4307.75 J10.01@4522,4311
NetQ1_1: Q1.1 R10.2 R11.1 | length 260.7
  Bottom Layer w20: R11.1 R10.2 ; R11.1@2684.33,1823.15 2684.33,1664.85 Q1.1
NetQ1_3: Q1.3 R2.2 | length 273.6
  Bottom Layer w23: Q1.3 2721.87,1471.04 2779.8,1413.11 R2.2
NetQ2_1: Q2.1 R1.2 R2.1 | length 277.5
  Bottom Layer w20: Q2.1 Q2.1@2502.57,1255.46 ; R1.2@2683.02,1255.46 R1.2
  Bottom Layer w30: Q2.1@2502.57,1255.46 R1.2@2683.02,1255.46 ; R1.2 R2.1
NetQ3_3: Q3.3 R19.2 | length 266.7
  Bottom Layer w22: R19.2 3147,1426.53 3192,1471.53 Q3.3
NetQ4_1: Q4.1 R18.2 R19.1 | length 591.4
  Bottom Layer w30: R19.1 R18.2 3243,1151 3294,1100 3438,1100 3479,1141 Q4.1
NetQ5_1: Q5.1 R29.1 | length 234.8
  Bottom Layer w20: Q5.1@3821.6,4122.37 3821.6,4169.6 3842,4190 3999.29,4190 R29.1
NetR14_2: R14.2 U1.5 | length 961.9
  Bottom Layer w20: U1.5 3349,4179.33 3394,4134.33 3394,3731 3282,3619 3282,3444 3307.71,3418.29 R14.2
NetR15_2: R15.2 U1.6 | length 832.2
  Bottom Layer w20: R15.2@3173,3418.29 3206.29,3418.29 3232,3444 3232,3656 3335.7,3759.7 3335.7,4068.89 3304,4100.59 U1.6
NetR30_2: R30.2 U2.1 | length 610
  Bottom Layer w20: R30.2 1643.48,1982 1600.72,1982 1589,1970.28 1589,1704 1740,1553 U2.1
NetR31_2: R31.2 U3.1 | length 472.4
  Bottom Layer w20: R31.2 1489,2038.28 1500.72,2050 1702,2050 1740,2012 U3.1
NetR33_1: R33.1 R34.2 U4.2 | length 235.6
  Bottom Layer w20: R34.2 4061.71,4045 4127,4045 4152,4070 U4.2
RC_Node: C10.1 C11.2 R32.1 U4.6 U4.7 | length 660.9
  Bottom Layer w20: U4.6 U4.7 4510,4070 4544.71,4035.29 R32.1 4675.94,3940 C10.1 4748.28,3940.06 4760,3951.77 C11.2
RX: J6.02 U1.21 | length 690.3
  Bottom Layer w20: J6.02 2047,4391 2071.56,4415.56 U1.21
SCL_3: IC1.2 R8.2 R14.1 | length 944.2
  Top Layer w20: v1(3022,3441) 3369,3441 v1(3408,3480)
  Bottom Layer w20: v1(3022,3441) 3022,3327 3073.39,3275.61 3073.39,3166.06 IC1.2 ; v1(3408,3480) 3407.85,3479.85 3338.15,3479.85 R14.1 3338,3527 3345,3534 3345,3535.18 3366.11,3556.29 R8.2
SDA_3: IC1.3 R13.2 R15.1 | length 596
  Bottom Layer w20: R13.2 3146.71,3556.29 3169,3534 R15.1 3118.71,3479.71 3080,3441 3080,3367.77 3123.77,3324 IC1.3
SWCLK: J5.3 U1.17 | length 859.3
  Bottom Layer w20: J5.3 1947,4035 2012.59,4100.59 U1.17
SWDIO: J5.2 U1.16 | length 695.1
  Bottom Layer w20: J5.2 2047,3981 2087.85,4021.85 U1.16
TX: J6.01 U1.22 | length 828.4
  Bottom Layer w20: J6.01@1947,4337 1947,4438 2003.3,4494.3 U1.22
WDT_OUT: R28.1 R29.2 U4.3 | length 225.3
  Bottom Layer w20: R29.2 4061.71,4120 U4.3
WDT_SW: J10.02 U4.4 | length 773.3
  Bottom Layer w20: U4.4 4161.72,4170 4150,4181.72 4150,4294 4187,4331 4369,4331 4436,4398 4588,4398 4622,4364 J10.02@4622,4303
pads on no net: *1.1 *1.8 *2.5 *2.8 IC1.16 J3.3 J8.4 S2.S1 S2.S2 S3.S1 S3.S2 U1.1 U1.2 U1.3 U1.4 U1.7 U1.10 U1.12 U1.13 U1.14 U5.9

## Silkscreen, mask and mechanical layers (free items; w line width, h text height)
Top Overlay:
  the board outline again, w10

## Text inside footprints (layer, text, board x,y; h text height)
*1: Top Overlay "1" at 1756.7,1346.26 h50.02
*2: Top Overlay "1" at 3676.7,1346.26 h50.02
C10: Bottom Overlay "+" at 4597.26,3971.55 h40 r270; Mechanical 13 "+" at 4597.26,3971.55 h40 r270
U1: Bottom Overlay "*" at 3317.13,4523.67 h50